# EAGLE board RGBW+Bluetooth+adapter (EAGLE 5.10), part 1 of 2
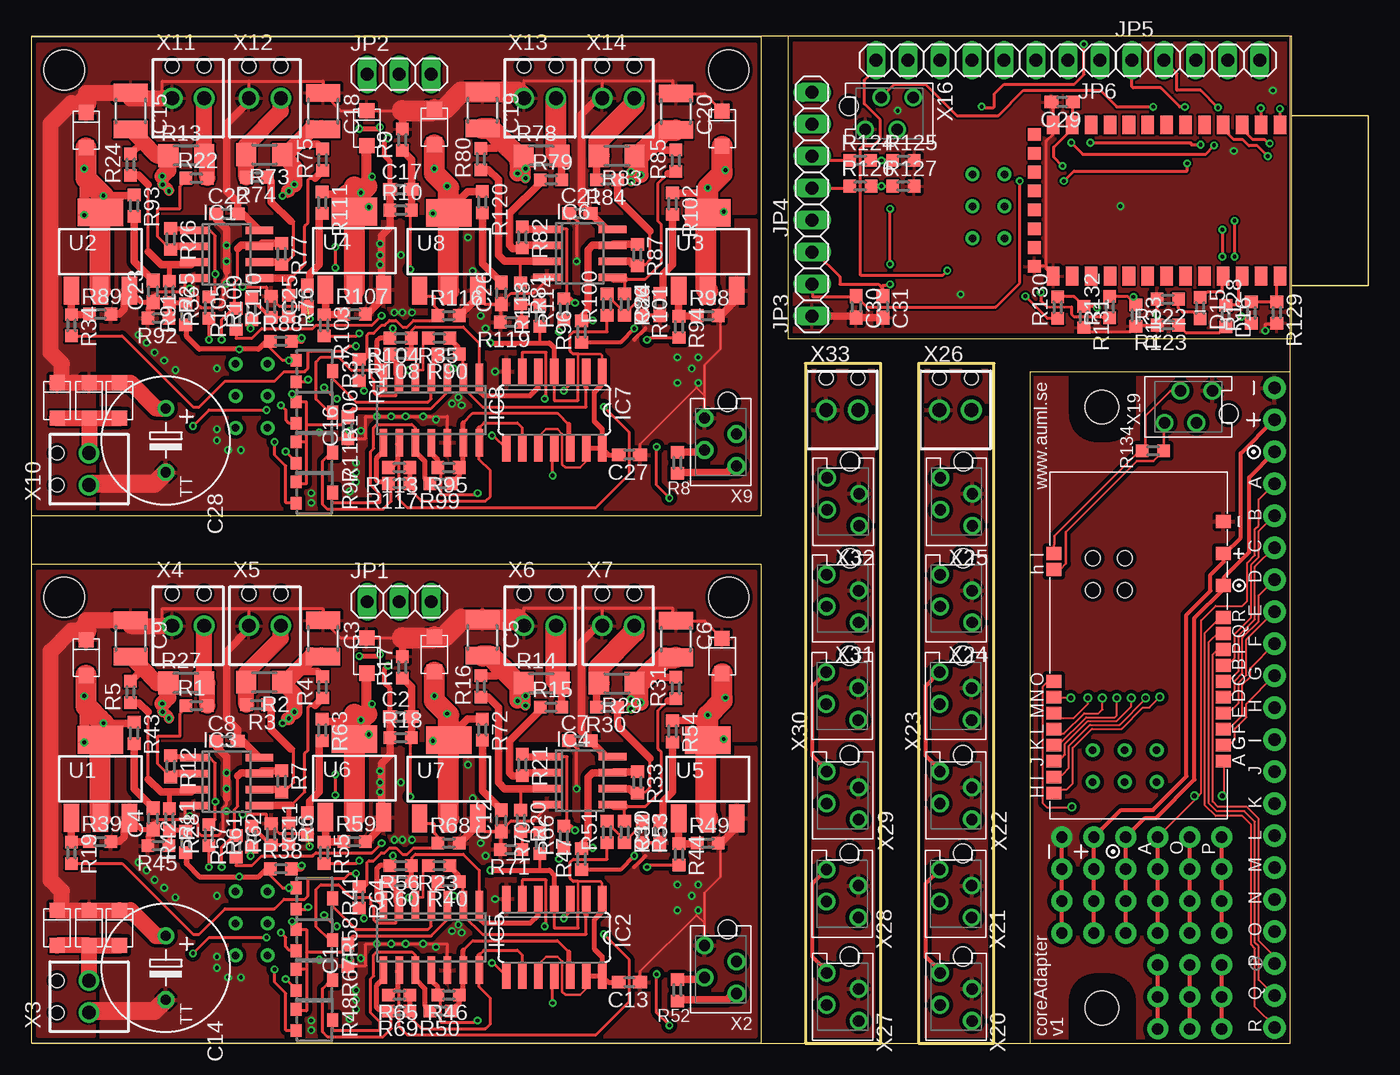
[diagram p0: board, top side]
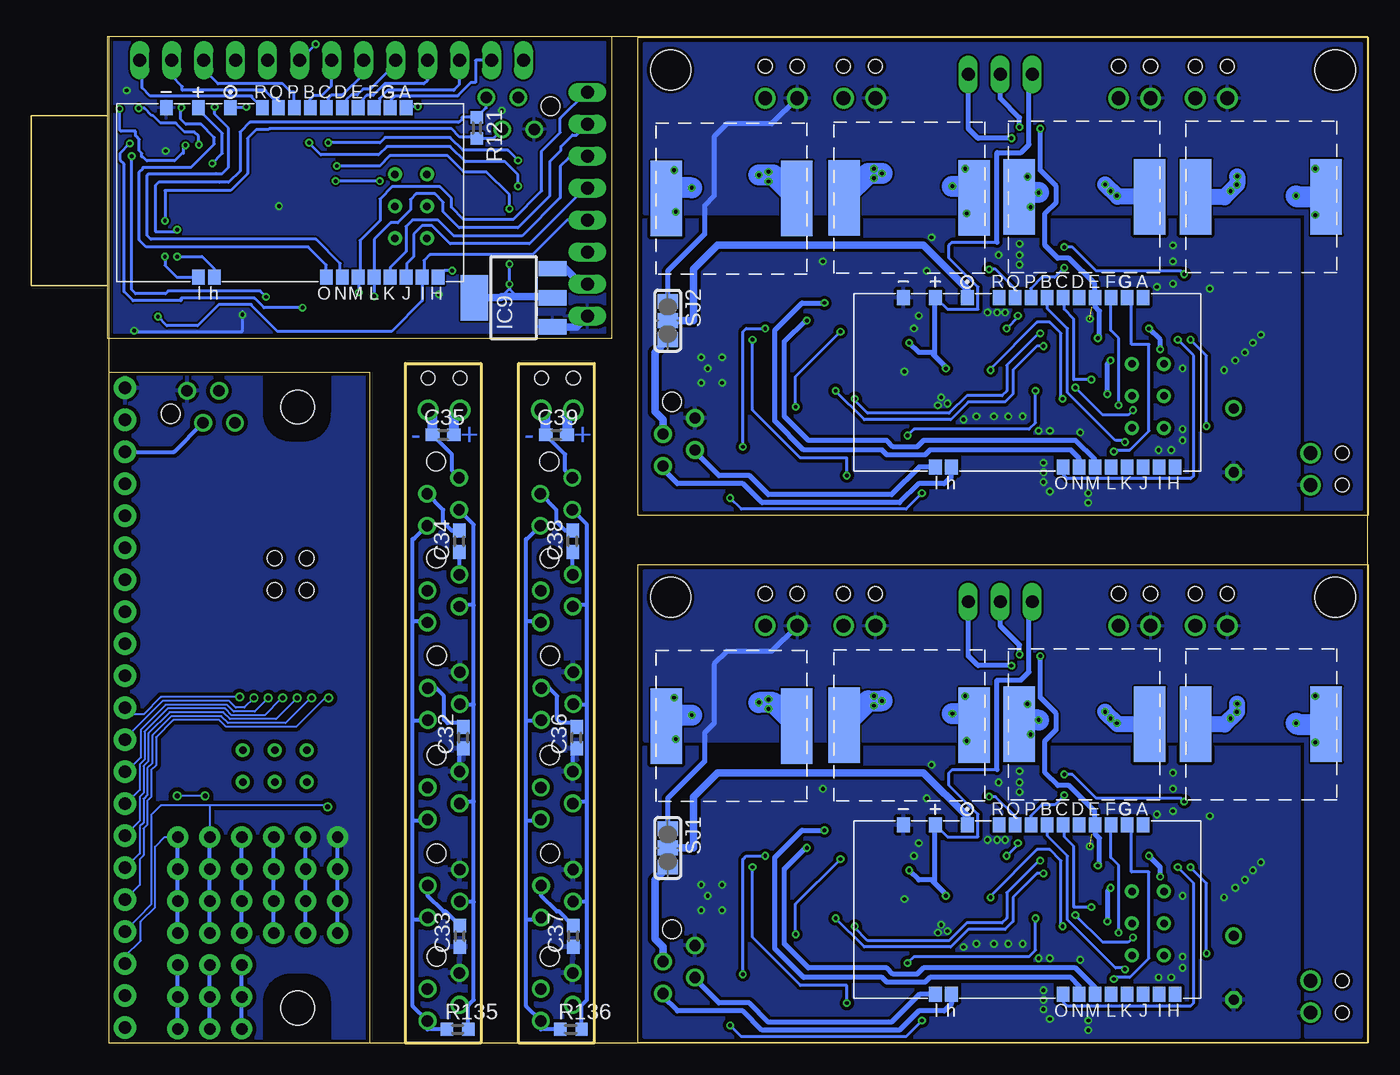
[diagram p1: board, bottom side, seen from below]

Size 100.1 x 80 mm. Coordinates in mm from the lower left corner, seen from the top.
Outline: 0,80 100,80 100,0 0,0 0,80
Outline: 58,80.01 0,80
Outline: 0,0.03 58,0.03 58,38.03 0,38.03 0,0.03
Outline: 0,41.93 58,41.93 58,79.93 0,79.93 0,41.93
Outline: 60.1,56 100.1,56 100.1,80 60.1,80 60.1,56
Outline: 100.01,0 100.01,53.34 79.3,53.34 79.3,0 100.01,0
Outline: 76.47,0.01 76.47,54.01 70.47,54.01 70.47,0.01 76.47,0.01
Outline: 67.47,0.01 67.47,54.01 61.46,54.01 61.46,0.01 67.47,0.01
Copper layers (1*16): Top 0.035mm / dielectric 1.5mm / Bottom 0.035mm
Design rules "ITead_rule": minimum track width 6mil, minimum drill 12mil, track to track 6mil, track to pad 6mil, pad to pad 6mil, via to via 6mil, smd to smd 0mil, copper to edge 10mil, drill to drill 10mil, minimum pad ring 10mil, minimum via ring 6mil, stop-mask expansion 2mil, vias tented up to drill 100mil, thermal gap 10mil
Holes 3.2 mm at 2.6,35.43 55.4,35.43 2.6,77.33 55.4,77.33
Holes 2.7 mm at 85.02,50.55 85.02,2.79

## Footprints (pad centres in the part's own frame; a part is rotated, then mirrored left to right if it is on the bottom)
C0603 = smd 1.1 x 1: 1 -0.85,0; 2 0.85,0
C1210 = smd 1.4 x 2.7: 1 -1.4,0; 2 1.5,0
TT5D10 = drill 0.813 round: + -2.54,0 | drill 0.813 octagon: - 2.54,0
SOD-123W = smd 1.2 x 1.2: A 1.4,0; C -1.4,0
0603 = smd 0.991 x 1.016: A -0.85,0; C 0.85,0
SO08 = smd 0.6 x 2.2: 1 -1.905,-2.6; 2 -0.635,-2.6; 3 0.635,-2.6; 4 1.905,-2.6; 5 1.905,2.6; 6 0.635,2.6; 7 -0.635,2.6; 8 -1.905,2.6
SO14 = smd 0.66 x 2.032: 1 -3.81,-3.073; 2 -2.54,-3.073; 3 -1.27,-3.073; 4 0,-3.073; 5 1.27,-3.073; 6 2.54,-3.073; 7 3.81,-3.073; 8 3.81,3.073; 9 2.54,3.073; 10 1.27,3.073; 11 0,3.073; 12 -1.27,3.073; 13 -2.54,3.073; 14 -3.81,3.073
SO14' = smd 0.6 x 2.2: 1 -3.81,-2.6; 2 -2.54,-2.6; 3 -1.27,-2.6; 4 0,-2.6; 5 1.27,-2.6; 6 2.54,-2.6; 7 3.81,-2.6; 8 3.81,2.6; 9 2.54,2.6; 10 1.27,2.6; 11 0,2.6; 12 -1.27,2.6; 13 -2.54,2.6; 14 -3.81,2.6
SOT223 = smd 1.219 x 2.235: 1 -2.311,-3.099; 2 0,-3.099; 3 2.311,-3.099 | smd 3.6 x 2.2: 4 0,3.099
1X03 = drill 1.016 long: 1 -2.54,0; 2 0,0; 3 2.54,0
1X05 = drill 1.016 long: 1 -5.08,0; 2 -2.54,0; 3 0,0; 4 2.54,0; 5 5.08,0
1X08 = drill 1.016 long: 1 -8.89,0; 2 -6.35,0; 3 -3.81,0; 4 -1.27,0; 5 1.27,0; 6 3.81,0; 7 6.35,0; 8 8.89,0
R0603 = smd 0.991 x 1.016: 1 -0.85,0; 2 0.85,0
R1206 = smd 1.6 x 1.803: 1 -1.422,0; 2 1.422,0
TRIM_PVZ3 = smd 1 x 0.9: 1 0.5,0.45; 3 2.2,0.45 | smd 1.1 x 0.9: 2 1.35,3.35
SJ_2_NO = smd 1.168 x 1.6: 1 -1.524,0; 2 0,0; 3 1.524,0
12X12 = smd 6 x 2.5: P$1 6,0.79; P$2 6,11.15
BC4 = smd 1.5 x 1: 1 -5.75,9.5; 2 -5.75,8; 3 -5.75,6.5; 4 -5.75,5; 5 -5.75,3.5; 6 -5.75,2; 7 -5.75,0.5; 8 -5.75,-1; 9 -5.75,-2.5; 10 -5.75,-4; 11 -5.75,-5.5; 12 -5.75,-7; 13 -5.75,-8.5; 22 6.25,-8.5; 23 6.25,-7; 24 6.25,-5.5; 25 6.25,-4; 26 6.25,-2.5; 27 6.25,-1; 28 6.25,0.5; 29 6.25,2; 30 6.25,3.5; 31 6.25,5; 32 6.25,6.5; 33 6.25,8; 34 6.25,9.5 | smd 1 x 1: 14 -5,-10; 15 -3.5,-10; 16 -2,-10; 17 -0.5,-10; 18 1,-10; 19 2.5,-10; 20 4,-10; 21 5.5,-10
CORETWO_LAYOUT_ISPHOLES_CU = smd 1 x 1.2: 5V 7.315,-6.648; A -9.195,-6.648; B -1.575,-6.648; C -2.845,-6.648; CANH 6.045,6.814; CANL 7.315,6.814; D -4.115,-6.648; E -5.385,-6.648; F -6.655,-6.648; G -7.925,-6.648; GND 9.855,-6.648; H -11.735,6.814; I -10.465,6.814; J -9.195,6.814; K -7.925,6.814; L -6.655,6.814; M -5.385,6.814; N -4.115,6.814; O -2.845,6.814; P -0.305,-6.648; Q 0.965,-6.648; R 2.235,-6.648; VCAN 4.775,-6.648 | drill 0.6 round: P$1 -10.846,3.708; P$2 -8.306,3.708; P$3 -10.846,1.168; P$4 -8.306,1.168; P$5 -8.306,-1.372; P$6 -10.846,-1.372
MICROMATCH-4 = drill 0.9 round: 1 1.905,1.27; 2 0.635,-1.27; 3 -0.635,1.27; 4 -1.905,-1.27 | hole 1.5: 3.199,-0.562
PCB2 = drill 1.1 round: 1 -2.54,0; 2 0,0 | hole 1.1: -2.54,2.54; 0,2.54
CORE_IOHEAD_NOSILC = drill 1 pad 1.778 round: 1 25.4,0; 2 22.86,0; 3 20.32,0; 4 17.78,0; 5 15.24,0; 6 12.7,0; 7 10.16,0; 8 7.62,0; 9 5.08,0; 10 2.54,0; 11 0,0; 12 -2.54,0; 13 -5.08,0; 14 -7.62,0; 15 -10.16,0; 16 -12.7,0; 17 -15.24,0; 18 -17.78,0; 19 -20.32,0; 20 -22.86,0; 21 -25.4,0
CORETWO_LAYOUT_CU = smd 1 x 1.2: 5V 7.62,-7.258; A -8.89,-7.258; B -1.27,-7.258; C -2.54,-7.258; CANH 6.35,6.204; CANL 7.62,6.204; D -3.81,-7.258; E -5.08,-7.258; F -6.35,-7.258; G -7.62,-7.258; GND 10.16,-7.258; H -11.43,6.204; I -10.16,6.204; J -8.89,6.204; K -7.62,6.204; L -6.35,6.204; M -5.08,6.204; N -3.81,6.204; O -2.54,6.204; P 0,-7.258; Q 1.27,-7.258; R 2.54,-7.258; VCAN 5.08,-7.258 | drill 0.6 round: P$1 -10.541,3.099; P$2 -8.001,3.099; P$3 -10.541,0.559; P$4 -8.001,0.559; P$5 -8.001,-1.981; P$6 -10.541,-1.981 | hole 1.2: 4.699,3.099; 7.239,3.099; 7.239,0.559; 4.699,0.559

## Placement (x,y rotation side)
C1  100n  [C0603]  25.15,7.01 90 top
C2  100n  [C0603]  29.34,25.94 0 top
C3  [C1210]  23.16,32.2 270 top
C4  10n  [C0603]  9.67,17.84 90 top
C5  [C1210]  35.81,32.29 270 top
C6  [C1210]  51.18,32.16 270 top
C7  100n  [C0603]  43.56,24.03 0 top
C8  100n  [C0603]  15.52,24.01 0 top
C9  [C1210]  7.87,32.22 270 top
C10  10n  [C0603]  49.91,16.79 90 top
C11  10n  [C0603]  21.92,17.43 90 top
C12  10n  [C0603]  37.34,17.68 90 top
C13  100n  [C0603]  47.5,4.85 180 top
C14  EEUFK1V102L  [TT5D10]  10.67,6 270 top
C15  [C1210]  7.87,74.11 270 top
C16  100n  [C0603]  25.15,48.91 90 top
C17  100n  [C0603]  29.34,67.84 0 top
C18  [C1210]  23.16,74.11 270 top
C19  [C1210]  35.81,74.19 270 top
C20  [C1210]  51.18,74.06 270 top
C21  100n  [C0603]  43.56,65.93 0 top
C22  100n  [C0603]  15.52,65.91 0 top
C23  10n  [C0603]  9.67,59.74 90 top
C24  10n  [C0603]  49.91,58.69 90 top
C25  10n  [C0603]  21.92,59.34 90 top
C26  10n  [C0603]  37.34,59.58 90 top
C27  100n  [C0603]  47.5,46.75 180 top
C28  EEUFK1V102L  [TT5D10]  10.67,47.9 270 top
C29  100n  [C0603]  81.87,74.77 180 top
C30  0.22µ  [C0603]  65.51,58.5 270 top
C31  100n  [C0603]  67.63,58.5 270 top
C32  [C0603]  71.86,24.28 90 bottom
C33  [C0603]  72.13,8.5 90 bottom
C34  [C0603]  72.18,39.88 90 bottom
C35  [C0603]  73.46,48.33 0 bottom
C36  [C0603]  62.86,24.28 90 bottom
C37  [C0603]  63.13,8.5 90 bottom
C38  [C0603]  63.18,39.88 90 bottom
C39  [C0603]  64.46,48.33 0 bottom
D1  [SOD-123W]  4.35,30.64 270 top
D2  [SOD-123W]  26.64,30.8 270 top
D3  [SOD-123W]  32,30.89 270 top
D4  [SOD-123W]  54.86,30.76 270 top
D5  [SOD-123W]  2.03,9.17 270 top
D6  [SOD-123W]  4.57,9.17 270 top
D7  [SOD-123W]  6.98,9.17 270 top
D8  [SOD-123W]  4.35,72.54 270 top
D9  [SOD-123W]  2.03,51.07 270 top
D10  [SOD-123W]  26.64,72.7 270 top
D11  [SOD-123W]  32,72.79 270 top
D12  [SOD-123W]  54.86,72.66 270 top
D13  [SOD-123W]  4.57,51.07 270 top
D14  [SOD-123W]  6.98,51.07 270 top
D15  LED  [0603]  92.83,58.42 270 top
D16  LED  [0603]  94.86,57.78 270 top
IC1  TL082D  [SO08]  15.5,62.69 270 top
IC2  74HC126D  [SO14]  41.53,8.41 180 top
IC3  TL082D  [SO08]  15.5,20.79 270 top
IC4  TL082D  [SO08]  43.56,20.86 270 top
IC5  LM339D  [SO14']  31.75,8.41 180 top
IC6  TL082D  [SO08]  43.56,62.76 270 top
IC7  74HC126D  [SO14]  41.53,50.31 180 top
IC8  LM339D  [SO14']  31.75,50.31 180 top
IC9  LM1117MP-3.3  [SOT223]  67.88,59.23 90 bottom
JP1  [1X03]  29.21,35.08 0 top
JP2  [1X03]  29.21,76.98 0 top
JP3  [1X03]  62.01,60.32 90 top
JP4  [1X05]  62.01,70.48 90 top
JP5  [1X05]  92.49,78.1 0 top
JP6  [1X08]  75.98,78.1 180 top
R1  5k  [R0603]  13.11,26.83 0 top
R2  0R1  [R1206]  18.49,28.7 180 top
R3  5k  [R0603]  17.91,26.9 180 top
R4  5k  [R0603]  23.13,28.29 90 top
R5  5k  [R0603]  7.87,27.91 90 top
R6  250k  [R0603]  20.43,16.66 270 top
R7  250k  [R0603]  19.87,20.81 270 top
R8  [R0603]  51.31,46.12 90 top
R9  47k  [R0603]  29.46,71.77 90 top
R10  12k  [R0603]  29.34,66.19 0 top
R11  250k  [R0603]  10.96,17.8 270 top
R12  250k  [R0603]  11.06,22 270 top
R13  0R1  [R1206]  12.3,70.52 0 top
R14  0R1  [R1206]  40.51,28.6 0 top
R15  5k  [R0603]  41.27,26.7 0 top
R16  5k  [R0603]  35.69,28.35 90 top
R17  47k  [R0603]  29.46,29.87 90 top
R18  12k  [R0603]  29.34,24.29 0 top
R19  10  [R0603]  3.17,15.14 270 top
R20  250k  [R0603]  38.86,17.68 270 top
R21  250k  [R0603]  38.99,22.13 270 top
R22  5k  [R0603]  13.11,68.73 0 top
R23  40k  [R0603]  32.38,14.12 180 top
R24  5k  [R0603]  7.87,69.81 90 top
R25  250k  [R0603]  10.96,59.7 270 top
R26  250k  [R0603]  11.06,63.9 270 top
R27  0R1  [R1206]  12.3,28.62 0 top
R28  1k  [R0603]  14.1,16.54 90 top
R29  0R1  [R1206]  46.48,28.6 180 top
R30  5k  [R0603]  45.72,26.7 180 top
R31  5k  [R0603]  51.18,28.22 90 top
R32  250k  [R0603]  47.12,16.79 270 top
R33  250k  [R0603]  48.13,20.73 270 top
R34  10  [R0603]  3.17,57.04 270 top
R35  40k  [R0603]  32.38,56.02 180 top
R36  1k  [R0603]  14.1,58.44 90 top
R37  [TRIM_PVZ3]  20.57,54.76 270 top
R38  40k  [R0603]  19.81,13.87 0 top
R39  10k  [R0603]  5.46,16.03 0 top
R40  15k  [R0603]  33.15,12.86 180 top
R41  [TRIM_PVZ3]  20.57,12.86 270 top
R42  500  [R0603]  12.25,16.01 90 top
R43  500  [R0603]  8.16,24.65 270 top
R44  10  [R0603]  51.43,15.01 270 top
R45  10k  [R0603]  10.09,15.71 180 top
R46  40k  [R0603]  33.15,3.84 180 top
R47  1k  [R0603]  43.69,14.63 90 top
R48  [TRIM_PVZ3]  20.57,3.2 270 top
R49  10k  [R0603]  53.72,15.9 0 top
R50  15k  [R0603]  32.51,2.57 180 top
R51  500  [R0603]  45.72,16.79 90 top
R52  [R0603]  51.31,4.22 90 top
R53  10k  [R0603]  48.51,16.79 270 top
R54  500  [R0603]  50.93,24.79 270 top
R55  10  [R0603]  23.24,15.14 270 top
R56  40k  [R0603]  29.34,14.12 180 top
R57  1k  [R0603]  16.26,15.65 90 top
R58  [TRIM_PVZ3]  20.57,9.55 270 top
R59  10k  [R0603]  25.65,16.03 0 top
R60  15k  [R0603]  29.34,12.86 180 top
R61  500  [R0603]  17.49,16.42 90 top
R62  10k  [R0603]  19.05,16.61 90 top
R63  500  [R0603]  23.1,24.89 270 top
R64  10  [R0603]  26.04,11.59 270 top
R65  40k  [R0603]  29.21,3.84 180 top
R66  1k  [R0603]  42.29,16.41 90 top
R67  [TRIM_PVZ3]  20.57,6.38 270 top
R68  10k  [R0603]  33.15,15.9 0 top
R69  15k  [R0603]  29.21,2.57 180 top
R70  500  [R0603]  40.39,15.9 90 top
R71  10k  [R0603]  38.1,15.39 180 top
R72  500  [R0603]  35.81,24.92 270 top
R73  0R1  [R1206]  18.49,70.6 180 top
R74  5k  [R0603]  17.91,68.8 180 top
R75  5k  [R0603]  23.13,70.19 90 top
R76  250k  [R0603]  20.43,58.56 270 top
R77  250k  [R0603]  19.87,62.71 270 top
R78  0R1  [R1206]  40.51,70.5 0 top
R79  5k  [R0603]  41.27,68.6 0 top
R80  5k  [R0603]  35.69,70.25 90 top
R81  250k  [R0603]  38.86,59.58 270 top
R82  250k  [R0603]  38.99,64.03 270 top
R83  0R1  [R1206]  46.48,70.5 180 top
R84  5k  [R0603]  45.72,68.6 180 top
R85  5k  [R0603]  51.18,70.12 90 top
R86  250k  [R0603]  47.12,58.69 270 top
R87  250k  [R0603]  48.13,62.63 270 top
R88  40k  [R0603]  19.81,55.77 0 top
R89  10k  [R0603]  5.46,57.93 0 top
R90  15k  [R0603]  33.15,54.76 180 top
R91  500  [R0603]  12.25,57.91 90 top
R92  10k  [R0603]  10.09,57.61 180 top
R93  500  [R0603]  8.16,66.55 270 top
R94  10  [R0603]  51.43,56.91 270 top
R95  40k  [R0603]  33.15,45.74 180 top
R96  1k  [R0603]  43.69,56.53 90 top
R97  [TRIM_PVZ3]  20.57,45.1 270 top
R98  10k  [R0603]  53.72,57.8 0 top
R99  15k  [R0603]  32.51,44.47 180 top
R100  500  [R0603]  45.72,58.69 90 top
R101  10k  [R0603]  48.51,58.69 270 top
R102  500  [R0603]  50.93,66.69 270 top
R103  10  [R0603]  23.24,57.04 270 top
R104  40k  [R0603]  29.34,56.02 180 top
R105  1k  [R0603]  16.26,57.55 90 top
R106  [TRIM_PVZ3]  20.57,51.45 270 top
R107  10k  [R0603]  25.65,57.93 0 top
R108  15k  [R0603]  29.34,54.76 180 top
R109  500  [R0603]  17.49,58.32 90 top
R110  10k  [R0603]  19.05,58.51 90 top
R111  500  [R0603]  23.1,66.79 270 top
R112  10  [R0603]  26.04,53.48 270 top
R113  40k  [R0603]  29.21,45.74 180 top
R114  1k  [R0603]  42.29,58.31 90 top
R115  [TRIM_PVZ3]  20.57,48.28 270 top
R116  10k  [R0603]  33.15,57.8 0 top
R117  15k  [R0603]  29.21,44.47 180 top
R118  500  [R0603]  40.39,57.8 90 top
R119  10k  [R0603]  38.1,57.3 180 top
R120  500  [R0603]  35.81,66.82 270 top
R121  [R0603]  70.79,72.72 270 bottom
R122  1k  [R0603]  90.26,59.11 180 top
R123  1k  [R0603]  90.27,57.07 180 top
R124  4k7  [R0603]  65.83,70.14 0 top
R125  6k8  [R0603]  69.27,70.14 0 top
R126  4k7  [R0603]  65.84,68.1 0 top
R127  6k8  [R0603]  69.25,68.1 0 top
R128  4k7  [R0603]  96.9,58.03 90 top
R129  6k8  [R0603]  98.93,58.05 270 top
R130  4k7  [R0603]  81.52,58.46 90 top
R131  6k8  [R0603]  83.59,57.71 270 top
R132  4k7  [R0603]  85.65,58.5 90 top
R133  6k8  [R0603]  87.73,57.82 270 top
R134  [R0603]  89.08,47.07 180 top
R135  [R0603]  72.32,1.11 0 bottom
R136  [R0603]  63.32,1.11 0 bottom
SJ1  [SJ_2_NO]  55.63,15.52 270 bottom
SJ2  [SJ_2_NO]  55.63,57.42 270 bottom
U1  NFT3055L175  [SOT223]  5.48,21 0 top
U2  NFT3055L175  [SOT223]  5.48,62.9 0 top
U3  NFT3055L175  [SOT223]  53.72,62.88 0 top
U4  NFT3055L175  [SOT223]  25.66,62.96 0 top
U5  NFT3055L175  [SOT223]  53.72,20.98 0 top
U6  NFT3055L175  [SOT223]  25.66,21.06 0 top
U7  NFT3055L175  [SOT223]  33.15,20.98 0 top
U8  NFT3055L175  [SOT223]  33.15,62.88 0 top
U$1  12X12  [12X12]  44.58,19.2 90 bottom
U$2  12X12  [12X12]  42.42,31.27 270 bottom
U$3  12X12  [12X12]  16.56,19.34 90 bottom
U$4  12X12  [12X12]  14.48,31.34 270 bottom
U$5  12X12  [12X12]  44.58,61.1 90 bottom
U$6  12X12  [12X12]  42.42,73.17 270 bottom
U$7  12X12  [12X12]  16.56,61.24 90 bottom
U$8  12X12  [12X12]  14.48,73.24 270 bottom
U$9  BT_BC4  [BC4]  89.67,67.21 270 top
X1  CORETWO_LAYOUTISPHOLES_CU  [CORETWO_LAYOUT_ISPHOLES_CU]  27.05,10.7 180 bottom
X2  MICROMATCH-4  [MICROMATCH-4]  54.74,5.87 90 top
X3  BLOCK2  [PCB2]  4.57,4.98 90 top
X4  BLOCK2  [PCB2]  13.72,33.17 0 top
X5  BLOCK2  [PCB2]  19.81,33.17 0 top
X6  BLOCK2  [PCB2]  41.66,33.17 0 top
X7  BLOCK2  [PCB2]  47.88,33.17 0 top
X8  CORETWO_LAYOUTISPHOLES_CU  [CORETWO_LAYOUT_ISPHOLES_CU]  27.05,52.6 180 bottom
X9  MICROMATCH-4  [MICROMATCH-4]  54.74,47.77 90 top
X10  BLOCK2  [PCB2]  4.57,46.88 90 top
X11  BLOCK2  [PCB2]  13.72,75.08 0 top
X12  BLOCK2  [PCB2]  19.81,75.08 0 top
X13  BLOCK2  [PCB2]  41.66,75.08 0 top
X14  BLOCK2  [PCB2]  47.88,75.08 0 top
X15  CORETWO_LAYOUTISPHOLES_CU  [CORETWO_LAYOUT_ISPHOLES_CU]  85.6,67.67 180 bottom
X16  MICROMATCH-4  [MICROMATCH-4]  68.13,73.87 180 top
X17  CORE_IOHEADEXP  [CORE_IOHEAD_NOSILC]  98.73,26.67 90 bottom
X18  CORETWO_LAYOUTALLHOLES_CU  [CORETWO_LAYOUT_CU]  87.41,31.29 90 top
X19  MICROMATCH-4  [MICROMATCH-4]  91.9,50.57 0 top
X20  MICROMATCH-4  [MICROMATCH-4]  73.44,3.69 90 top
X21  MICROMATCH-4  [MICROMATCH-4]  73.41,11.89 90 top
X22  MICROMATCH-4  [MICROMATCH-4]  73.43,19.69 90 top
X23  MICROMATCH-4  [MICROMATCH-4]  73.41,27.59 90 top
X24  MICROMATCH-4  [MICROMATCH-4]  73.45,35.33 90 top
X25  MICROMATCH-4  [MICROMATCH-4]  73.47,43.03 90 top
X26  BLOCK22.54  [PCB2]  74.67,50.31 0 top
X27  MICROMATCH-4  [MICROMATCH-4]  64.44,3.69 90 top
X28  MICROMATCH-4  [MICROMATCH-4]  64.41,11.89 90 top
X29  MICROMATCH-4  [MICROMATCH-4]  64.43,19.69 90 top
X30  MICROMATCH-4  [MICROMATCH-4]  64.41,27.59 90 top
X31  MICROMATCH-4  [MICROMATCH-4]  64.45,35.33 90 top
X32  MICROMATCH-4  [MICROMATCH-4]  64.47,43.03 90 top
X33  BLOCK22.54  [PCB2]  65.67,50.31 0 top

## Library data of the parts
C1-C39 R1-R136 = rcl
D1-D14 = diode
D15 D16 = led
IC1 IC3-IC6 IC8 = linear
IC2 IC7 = 74xx-eu
IC9 = lm1117mp
JP1-JP6 = pinhead
SJ1 SJ2 = jumper
U1-U8 = NMOS_NTF3055L175
U$1-U$8 = inductor10x10
U$9 = bluetooth
X1 X8 X15 X17 X18 = expboard
X2 X9 X16 X19-X25 X27-X32 = con-amp-micromatch
X3-X7 X10-X14 X26 X33 = terminal_block

## Nets
CANH: R52.1 X1.CANH X2.4
CANH1: R8.1 X8.CANH X9.4
CANH2: R121.1 X15.CANH X16.4
CANH3: R134.1 X18.CANH X19.4
CANH4: R135.1 X20.4 X21.4 X22.4 X23.4 X24.4 X25.4
CANH5: R136.1 X27.4 X28.4 X29.4 X30.4 X31.4 X32.4
CANL: R52.2 X1.CANL X2.3
CANL1: R8.2 X8.CANL X9.3
CANL2: R121.2 X15.CANL X16.3
CANL3: R134.2 X18.CANL X19.3
CANL4: R135.2 X20.3 X21.3 X22.3 X23.3 X24.3 X25.3
CANL5: R136.2 X27.3 X28.3 X29.3 X30.3 X31.3 X32.3
EXP_A: JP6.1 X15.A
EXP_A1: X17.4 X18.A
EXP_B: R48.3 X1.B
EXP_B1: R97.3 X8.B
EXP_B2: JP6.2 X15.B
EXP_B3: X17.5 X18.B
EXP_C: R41.3 X1.C
EXP_C1: R37.3 X8.C
EXP_C2: JP6.3 X15.C
EXP_C3: X17.6 X18.C
EXP_D: JP6.4 X15.D
EXP_D1: X17.7 X18.D
EXP_E: JP1.2 R38.2 X1.E
EXP_E1: JP2.2 R88.2 X8.E
EXP_E2: JP6.5 X15.E
EXP_E3: X17.8 X18.E
EXP_F: R58.3 X1.F
EXP_F1: R106.3 X8.F
EXP_F2: JP6.6 X15.F
EXP_F3: X17.9 X18.F
EXP_G: R67.3 X1.G
EXP_G1: R115.3 X8.G
EXP_G2: JP6.7 X15.G
EXP_G3: X17.10 X18.G
EXP_H: JP6.8 X15.H
EXP_H1: X17.11 X18.H
EXP_I: JP4.1 R128.1 X15.I
EXP_I1: X17.12 X18.I
EXP_J: JP4.2 R126.1 X15.J
EXP_J1: X17.13 X18.J
EXP_K: JP4.3 R124.1 X15.K
EXP_K1: X17.14 X18.K
EXP_L: JP4.4 R130.1 X15.L
EXP_L1: X17.15 X18.L
EXP_M: IC4.7 R33.1 R47.2 X1.M
EXP_M1: IC6.7 R87.1 R96.2 X8.M
EXP_M2: JP4.5 R132.1 X15.M
EXP_M3: X17.16 X18.M
EXP_N: IC4.1 R21.1 R66.2 X1.N
EXP_N1: IC6.1 R82.1 R114.2 X8.N
EXP_N2: JP5.1 X15.N
EXP_N3: X17.17 X18.N
EXP_O: IC3.7 R7.1 R57.2 X1.O
EXP_O1: IC1.7 R77.1 R105.2 X8.O
EXP_O2: JP5.2 X15.O
EXP_O3: X17.18 X18.O
EXP_P: IC3.1 R12.1 R28.2 X1.P
EXP_P1: IC1.1 R26.1 R36.2 X8.P
EXP_P2: JP5.3 X15.P
EXP_P3: X17.19 X18.P
EXP_Q: C2.2 R17.1 R18.2 X1.Q
EXP_Q1: C17.2 R9.1 R10.2 X8.Q
EXP_Q2: JP5.4 X15.Q
EXP_Q3: X17.20 X18.Q
EXP_R: JP5.5 X15.R
EXP_R1: X17.21 X18.R
GATE1: R19.1 R39.1 U1.1
GATE2: R55.1 R59.1 U6.1
GATE3: R64.1 R68.1 U7.1
GATE4: R44.1 R49.1 U5.1
GATE5: R34.1 R89.1 U2.1
GATE6: R103.1 R107.1 U4.1
GATE7: R112.1 R116.1 U8.1
GATE8: R94.1 R98.1 U3.1
GND: C1.1 C2.1 C4.1 C7.1 C8.1 C10.1 C11.1 C12.1 C13.1 C14.- IC2.7 IC3.4 IC4.4 IC5.12 JP1.3 R18.1 R39.2 R45.2 R49.2 R53.2 R59.2 R62.2 R68.2 R71.2 U1.3 U5.3 U6.3 U7.3 X1.GND X2.1 X3.1
GND1: C16.1 C17.1 C21.1 C22.1 C23.1 C24.1 C25.1 C26.1 C27.1 C28.- IC1.4 IC6.4 IC7.7 IC8.12 JP2.3 R10.1 R89.2 R92.2 R98.2 R101.2 R107.2 R110.2 R116.2 R119.2 U2.3 U3.3 U4.3 U8.3 X8.GND X9.1 X10.1
GND2: C29.2 C30.2 C31.2 IC9.1 JP3.1 R122.2 R123.2 R125.2 R127.2 R129.2 R131.2 R133.2 U$9.13 U$9.21 U$9.22 X15.GND X16.1
GND3: X17.1 X18.GND X19.1
GND4: C32.1 C33.1 X20.1 X21.1 X22.1 X23.1
GND5: C34.1 X24.1
GND6: C36.1 C37.1 X27.1 X28.1 X29.1 X30.1
GND7: C38.1 X31.1
L1: D1.A R43.1 U1.2 U1.4 U$4.P$2
L2: D4.A R54.1 U5.2 U5.4 U$1.P$2
L3: D2.A R63.1 U6.2 U6.4 U$3.P$2
L4: D3.A R72.1 U7.2 U7.4 U$2.P$2
L5: D8.A R93.1 U2.2 U2.4 U$8.P$2
L6: D12.A R102.1 U3.2 U3.4 U$5.P$2
L7: D10.A R111.1 U4.2 U4.4 U$7.P$2
L8: D11.A R120.1 U8.2 U8.4 U$6.P$2
LINK: D16.A U$9.32
MODE: D15.A U$9.31
N$1: IC5.5 R23.2 R28.1
N$2: IC2.2 IC5.2 R23.1 R40.1
N$3: C3.2 R2.1 R4.2 U$3.P$1
N$4: R2.2 R3.2 X5.2
N$5: C9.2 R5.2 R27.1 U$4.P$1
N$6: IC3.6 R3.1 R7.2
N$7: SJ1.2 X1.VCAN
N$8: C15.2 R13.1 R24.2 U$8.P$1
N$9: IC3.5 R4.1 R6.1
N$10: R13.2 R22.2 X11.2
N$11: C5.2 R14.1 R16.2 U$2.P$1
N$12: R1.2 R27.2 X4.2
N$13: R14.2 R15.2 X6.2
N$14: IC4.2 R15.1 R21.2
N$15: IC1.2 R22.1 R26.2
N$16: IC8.5 R35.2 R36.1
N$17: IC4.3 R16.1 R20.1
N$18: IC8.4 R37.2 R90.2
N$19: IC3.3 R5.1 R11.1
N$20: C6.2 R29.1 R31.2 U$1.P$1
N$21: IC3.2 R1.1 R12.2
N$22: R29.2 R30.2 X7.2
N$23: IC4.6 R30.1 R33.2
N$24: IC1.3 R24.1 R25.1
N$25: IC7.2 IC8.2 R35.1 R90.1
N$26: IC4.5 R31.1 R32.1
N$27: C18.2 R73.1 R75.2 U$7.P$1
N$28: IC2.3 R19.2
N$29: C4.2 R43.2
N$30: IC5.4 R40.2 R41.2
N$31: R73.2 R74.2 X12.2
N$32: R11.2 R42.2 R45.1
N$33: IC1.6 R74.1 R77.2
N$34: IC1.5 R75.1 R76.1
N$35: IC5.11 R46.2 R47.1
N$36: IC5.10 R48.2 R50.2
N$37: IC2.12 IC5.13 R46.1 R50.1
N$38: IC2.11 R44.2
N$39: R32.2 R51.2 R53.1
N$40: C10.2 R54.2
N$41: IC5.7 R56.2 R57.1
N$42: IC5.6 R58.2 R60.2
N$43: IC2.5 IC5.1 R56.1 R60.1
N$44: IC2.6 R55.2
N$45: R6.2 R61.2 R62.1
N$46: C11.2 R63.2
N$47: IC5.9 R65.2 R66.1
N$48: IC5.8 R67.2 R69.2
N$49: IC2.9 IC5.14 R65.1 R69.1
N$50: IC2.8 R64.2
N$51: R20.2 R70.2 R71.1
N$52: C12.2 R72.2
N$53: C19.2 R78.1 R80.2 U$6.P$1
N$54: R78.2 R79.2 X13.2
N$55: IC6.2 R79.1 R82.2
N$56: IC6.3 R80.1 R81.1
N$57: C20.2 R83.1 R85.2 U$5.P$1
N$58: R83.2 R84.2 X14.2
N$59: IC6.6 R84.1 R87.2
N$60: IC6.5 R85.1 R86.1
N$61: IC7.3 R34.2
N$62: R25.2 R91.2 R92.1
N$63: C23.2 R93.2
N$64: IC8.11 R95.2 R96.1
N$65: IC8.10 R97.2 R99.2
N$66: IC7.12 IC8.13 R95.1 R99.1
N$67: IC7.11 R94.2
N$68: R86.2 R100.2 R101.1
N$69: C24.2 R102.2
N$70: IC8.7 R104.2 R105.1
N$71: IC8.6 R106.2 R108.2
N$72: IC7.5 IC8.1 R104.1 R108.1
N$73: IC7.6 R103.2
N$74: R76.2 R109.2 R110.1
N$75: C25.2 R111.2
N$76: IC8.9 R113.2 R114.1
N$77: IC8.8 R115.2 R117.2
N$78: IC7.9 IC8.14 R113.1 R117.1
N$79: IC7.8 R112.2
N$80: R81.2 R118.2 R119.1
N$81: C26.2 R120.2
N$82: SJ2.2 X8.VCAN
N$83: D15.C R122.1
N$84: D16.C R123.1
N$85: R124.2 R125.1 U$9.1
N$86: R126.2 R127.1 U$9.2
N$87: R128.2 R129.1 U$9.34
N$88: R130.2 R131.1 U$9.3
N$89: R132.2 R133.1 U$9.4
N$90: C35.1 X25.1 X26.2
N$91: C39.1 X32.1 X33.2
V_CAN: SJ1.3 X2.2
V_CAN1: SJ2.3 X9.2
V_CAN2: X15.VCAN X16.2
V_CAN3: X17.3 X18.VCAN X19.2
V_INPUT: D5.A D6.A D7.A X3.2
V_INPUT1: D9.A D13.A D14.A X10.2
V_LED: C3.1 C5.1 C6.1 C7.2 C8.2 C9.1 C14.+ D1.C D2.C D3.C D4.C D5.C D6.C D7.C IC3.8 IC4.8 R17.2 SJ1.1 X4.1 X5.1 X6.1 X7.1
V_LED1: C15.1 C18.1 C19.1 C20.1 C21.2 C22.2 C28.+ D8.C D9.C D10.C D11.C D12.C D13.C D14.C IC1.8 IC6.8 R9.2 SJ2.1 X11.1 X12.1 X13.1 X14.1
VCC: C1.2 C13.2 IC2.1 IC2.4 IC2.10 IC2.13 IC2.14 IC5.3 JP1.1 R38.1 R41.1 R42.1 R48.1 R51.1 R58.1 R61.1 R67.1 R70.1 X1.5V
VCC1: C16.2 C27.2 IC7.1 IC7.4 IC7.10 IC7.13 IC7.14 IC8.3 JP2.1 R37.1 R88.1 R91.1 R97.1 R100.1 R106.1 R109.1 R115.1 R118.1 X8.5V
VCC2: C30.1 IC9.3 JP3.2 X15.5V
VCC3: X17.2 X18.5V
VCC3.3: C29.1 C31.1 IC9.2 IC9.4 JP3.3 U$9.12
VCC_ARNE: C32.2 C33.2 C34.2 C35.2 X20.2 X21.2 X22.2 X23.2 X24.2 X25.2 X26.1
VCC_ARNE1: C36.2 C37.2 C38.2 C39.2 X27.2 X28.2 X29.2 X30.2 X31.2 X32.2 X33.1

## Tracks (layer width: path | path; a pad name or v marks a point on that pad's centre or on a via)
CANH
  Top 0.61: R52.1 51.4,3.46 55.24,3.46 55.75,3.96 X2.4
  Bottom 0.406: X1.CANH 33.1,3.13 33.66,2.57 35.69,2.57 37.21,1.04 48.13,1.04 49.66,2.57 54.86,2.57 56.01,3.71 X2.4
CANH1
  Top 0.61: R8.1 51.4,45.36 55.24,45.36 55.75,45.87 X9.4
  Bottom 0.406: X8.CANH 33.1,45.03 33.66,44.47 35.69,44.47 37.21,42.94 48.13,42.94 49.66,44.47 54.86,44.47 56.01,45.61 X9.4
CANH2  (via drill 0.3)
  Top 0.254: v94.6,64.64 v94.6,62.5
  Bottom 0.254: X16.4 70.04,74.31 R121.1 71.98,73.57 71.98,73.43 72.25,73.17 88.83,73.17 89.6,72.4 89.6,69.3 90.5,68.4 91.23,68.4 91.25,68.41 96.07,68.41 96.32,68.15 96.32,64.48 94.75,64.48 v94.6,64.64 | v94.6,62.5 92.62,62.5 91.65,61.54 X15.CANH
CANH3
  Top 0.203: X18.CANH 81.72,37.64 82.17,38.1 82.17,40.62 87.81,46.25 89.11,46.25 R134.1 | R134.1 89.95,47.09 | R134.1 89.93,49.13 90.02,49.23 90,49.25 X19.4
CANH4
  Bottom 0.305: R135.1 74.71,1.11 X20.4 75.88,2.95 75.88,9.84 | 75.88,9.84 75.88,17.72 | 75.88,17.72 75.88,25.64 | 75.88,25.64 75.88,33.54 | 75.88,33.54 75.88,40.09 75.77,40.09 X25.4 | X24.4 74.83,33.54 75.88,33.54 | X23.4 74.72,25.64 75.88,25.64 | X22.4 74.77,17.72 75.88,17.72 | X21.4 74.82,9.84 75.88,9.84
CANH5
  Bottom 0.305: R136.1 65.71,1.11 X27.4 66.88,2.95 66.88,9.84 | 66.88,9.84 66.88,17.72 | 66.88,17.72 66.88,25.64 | 66.88,25.64 66.88,33.54 | 66.88,33.54 66.88,40.09 66.77,40.09 X32.4 | X31.4 65.83,33.54 66.88,33.54 | X30.4 65.72,25.64 66.88,25.64 | X29.4 65.77,17.72 66.88,17.72 | X28.4 65.82,9.84 66.88,9.84
CANL
  Top 0.61: X2.3 53.3,5.07 R52.2
  Bottom 0.406: X1.CANL 35.64,3.88 37.85,1.68 47.62,1.68 49.15,3.2 51.56,3.2 53.47,5.11 X2.3
CANL1
  Top 0.61: X9.3 53.3,46.97 R8.2
  Bottom 0.406: X8.CANL 35.64,45.78 37.85,43.58 47.62,43.58 49.15,45.1 51.56,45.1 53.47,47.01 X9.3
CANL2  (via drill 0.3)
  Top 0.254: v95.56,65.35 v95.56,62.5
  Bottom 0.254: X15.CANL 94.62,60.85 95.56,61.79 v95.56,62.5 | 95.56,67.7 v95.56,65.35 | 95.56,67.7 95.56,67.75 | X16.3 69.51,71.87 R121.2 70.92,72 72.14,72 72.8,72.66 87.28,72.66 87.34,72.6 88.3,72.6 89,71.9 89,69.1 90.35,67.75 95.51,67.75 95.56,67.7
CANL3
  Top 0.203: X18.CANL 81.25,40.3 88.12,47.17 88.22,47.07 R134.2 88.5,47.32 88.5,49.84 90.48,51.82 91.17,51.82 91.24,51.89 91.27,51.87 X19.3
CANL4
  Bottom 0.305: 71.47,3.05 X20.3 | R135.2 71.47,3.05 | 71.05,11.24 71.05,3.44 71.44,3.05 71.47,3.05 | 71.05,11.24 71.05,19.19 | 71.05,19.19 71.05,26.89 | 71.05,26.89 71.05,34.81 | 71.05,34.81 71.05,41.21 72.2,42.37 X25.3 | X21.3 72.13,11.24 71.05,11.24 | X22.3 72.03,19.19 71.05,19.19 | X23.3 72.07,26.89 71.05,26.89 | X24.3 72.07,34.81 71.05,34.81
CANL5
  Bottom 0.305: 62.47,3.05 X27.3 | R136.2 62.47,3.05 | 62.05,11.24 62.05,3.44 62.44,3.05 62.47,3.05 | 62.05,11.24 62.05,19.19 | 62.05,19.19 62.05,26.89 | 62.05,26.89 62.05,34.81 | 62.05,34.81 62.05,41.21 63.2,42.37 X32.3 | X28.3 63.13,11.24 62.05,11.24 | X29.3 63.03,19.19 62.05,19.19 | X30.3 63.07,26.89 62.05,26.89 | X31.3 63.06,34.81 62.05,34.81
EXP_A  (via drill 0.3)
  Top 0.254: v83.6,79.37 83.6,76.95 82.84,76.19 77.25,76.19 76.49,75.43 76.49,74.39 X15.A 75.57,74.31 v75.47,74.42
  Bottom 0.254: v83.6,79.37 JP6.1 | v75.47,74.42 76.31,74.42 X15.A
EXP_A1  (via drill 0.4 pad 0.25)
  Top 0.152: X18.A 94.72,22.36 94.75,22.33 94.75,19.81 v94.59,19.66 | X17.4 97.49,43.2 97.49,41.15 97.19,40.84 97.19,38.79 96.58,38.18 96.58,35.13 96.2,34.75 94.06,34.75 92.92,33.6 92.92,19.89 92.69,19.66 v92.39,19.66 92.74,19.66 89.46,16.38
  Top 0.305: 89.46,13.84 89.46,16.38
  Bottom 0.152: v92.39,19.66 v94.59,19.66
EXP_B  (via drill 0.3)
  Top 0.254: v19.3,5.87 19.3,4.85 20.19,3.96 20.19,1.04 20.98,1.04 R48.3
  Bottom 0.254: X1.B 25.48,16.49 23.88,14.89 23.88,9.81 20.07,6 19.43,6 v19.3,5.87
EXP_B1  (via drill 0.3)
  Top 0.254: v19.3,47.77 19.3,46.75 20.19,45.87 20.19,42.94 20.98,42.94 R97.3
  Bottom 0.254: X8.B 25.48,58.39 23.88,56.79 23.88,51.71 20.07,47.9 19.43,47.9 v19.3,47.77
EXP_B2
  Bottom 0.254: JP6.2 82.33,76.07 83.09,75.3 83.73,75.3 84.11,74.92 84.11,74.39 X15.B
EXP_B3
  Top 0.152: X18.B 95,30.02 95.59,30.61 95.59,32.54 96.88,33.83 96.88,38.02 97.49,38.63 97.49,40.69 98.71,41.91 X17.5
EXP_C  (via drill 0.3)
  Top 0.254: v21.97,10.82 21.8,10.65 R41.3
  Bottom 0.254: v21.97,10.82 23.37,10.82 23.37,15.65 24.13,16.41 24.13,17.34 X1.C
EXP_C1  (via drill 0.3)
  Top 0.254: v21.97,52.72 21.8,52.55 R37.3
  Bottom 0.254: v21.97,52.72 23.37,52.72 23.37,57.55 24.13,58.31 24.13,59.24 X8.C
EXP_C2
  Bottom 0.254: 82.71,74.36 X15.C 82.61,74.46 82.61,75.05 82.35,75.3 81.49,75.3 79.84,76.95 79.84,78.05 JP6.3
EXP_C3
  Top 0.152: X18.C 94.95,28.63 95.89,29.57 95.89,32.38 97.19,33.68 97.19,37.87 98.71,39.4 X17.6
EXP_D
  Bottom 0.254: JP6.4 77.3,78.05 77.3,77.77 79.26,75.81 79.84,75.81 80.3,75.36 80.75,75.36 81.16,74.95 81.16,74.74 81.5,74.4 81.5,74.3 X15.D
EXP_D1
  Top 0.152: X18.D 94.98,27.36 95.59,27.96 95.59,28.8 96.2,29.41 96.2,32.23 97.49,33.53 97.49,35.59 X17.7 98.79,36.88
EXP_E  (via drill 0.3)
  Top 0.406: v26.04,30.76 27.69,30.76 v27.69,30.89 | R38.2 21.46,13.87 v21.46,14.12
  Bottom 0.406: v26.04,30.76 26.04,27.46 24.77,26.19 24.77,24.92 25.65,24.03 25.65,21.49 24.64,20.48 23.75,20.48 21.72,18.44 21.72,17.34 X1.E 21.67,16.61 21.34,16.28 21.34,14.25 v21.46,14.12 | v27.69,30.89 27.69,31.65 29.21,33.17 JP1.2
EXP_E1  (via drill 0.3)
  Top 0.406: v26.04,72.66 27.69,72.66 v27.69,72.79 | R88.2 21.46,55.77 v21.46,56.02
  Bottom 0.406: v26.04,72.66 26.04,69.36 24.77,68.09 24.77,66.82 25.65,65.93 25.65,63.39 24.64,62.38 23.75,62.38 21.72,60.34 21.72,59.24 X8.E 21.67,58.51 21.34,58.18 21.34,56.15 v21.46,56.02 | v27.69,72.79 27.69,73.55 29.21,75.08 JP2.2
EXP_E2
  Bottom 0.254: X15.E 79.92,74.62 79.92,74.92 79.54,75.3 79.03,75.3 78.11,76.22 75.01,76.22 74.71,76.52 JP6.5
EXP_E3
  Top 0.152: X18.E 95,26.16 95.89,27.05 95.89,28.65 96.5,29.26 96.5,32.08 98.71,34.29 X17.8
EXP_F  (via drill 0.3)
  Top 0.254: v19.81,8.79 20.19,8.41 20.19,7.65 20.45,7.39 20.98,7.39 R58.3
  Bottom 0.254: v19.81,8.79 19.81,14.12 20.45,14.76 20.45,16.79 20.4,16.84 X1.F
EXP_F1  (via drill 0.3)
  Top 0.254: v19.81,50.69 20.19,50.31 20.19,49.55 20.45,49.29 20.98,49.29 R106.3
  Bottom 0.254: v19.81,50.69 19.81,56.02 20.45,56.66 20.45,58.69 20.4,58.74 X8.F
EXP_F2
  Bottom 0.254: JP6.6 72.17,76.19 72.6,75.76 72.6,75.71 77.86,75.71 78.52,75.05 78.52,74.74 X15.F
EXP_F3
  Top 0.152: X18.F 94.95,24.82 96.2,26.06 96.2,28.5 96.81,29.11 96.81,29.79 98.76,31.75 | 98.76,31.75 98.79,31.77 | 98.76,31.75 X17.9
EXP_G  (via drill 0.3)
  Top 0.254: 20.94,4.09 R67.3 21.02,4.28 v20.19,5.11
  Bottom 0.254: X1.G 18.8,17.34 18.8,13.62 17.4,13.62 17.4,6.76 18.92,5.24 20.07,5.24 v20.19,5.11
EXP_G1  (via drill 0.3)
  Top 0.254: 20.94,45.99 R115.3 21.02,46.18 v20.19,47.01
  Bottom 0.254: X8.G 18.8,59.24 18.8,55.52 17.4,55.52 17.4,48.66 18.92,47.13 20.07,47.13 v20.19,47.01
EXP_G2
  Bottom 0.254: JP6.7 70.9,78.1 70.9,76.32 71.28,76.32 72.3,75.3 72.3,75.25 77.3,75.25 77.63,74.92 77.63,74.36 X15.G
EXP_G3
  Top 0.152: X18.G 94.98,23.55 95.59,24.16 95.59,24.99 96.5,25.91 96.5,26.98 X17.10
EXP_H  (via drill 0.3)
  Top 0.254: JP6.8 67.09,77.46 66.15,76.52 66.15,74.64 67.42,73.37 67.42,71.85 66.86,71.29 66.05,71.29 65.84,71.09 65.84,62.25 65.85,62.24 65.85,61.05 72.4,61.05 v72.75,61.39
  Bottom 0.254: v72.75,61.39 73.33,61.39 X15.H
EXP_H1  (via drill 0.4 pad 0.25)
  Top 0.152: X18.H 81.39,19.86 81.72,20.19 82.25,20.19 82.71,20.65 82.71,23.47 84.23,24.99 86.59,24.99 88.27,26.67 88.8,26.67 v89.64,27.51
  Bottom 0.152: X17.11 98.71,26.67 98.25,26.14 97.26,26.14 95.89,27.51 v89.64,27.51
EXP_I  (via drill 0.3)
  Top 0.254: v96.12,57.73 96.36,57.73 R128.1
  Bottom 0.254: v96.12,57.73 95.41,57.02 92.97,57.02 91.3,58.69 88.7,58.69 88.7,58.64 86.62,56.56 77.58,56.56 75.14,59 X15.I 74.99,61 74.99,62.2 74.53,62.66 66.35,62.66 63.61,65.4 JP4.1
EXP_I1  (via drill 0.4 pad 0.25)
  Top 0.152: X18.I 81.51,21.13 81.72,21.34 81.87,21.34 82.4,21.87 82.4,23.62 84.08,25.3 86.44,25.3 88.5,27.36 v88.5,27.43
  Bottom 0.152: v88.5,27.43 89.26,26.67 89.95,26.67 90.48,27.2 95.74,27.2 98.79,24.16 98.76,24.13 X17.12
EXP_J
  Top 0.254: JP4.2 64.73,67.94 64.89,68.1 R126.1
  Bottom 0.254: JP4.2 62.19,67.94 66.61,63.52 72.91,63.52 74.33,64.94 75.14,64.94 75.8,64.28 75.8,62.5 76.36,61.94 76.36,60.9 X15.J
EXP_J1  (via drill 0.4 pad 0.25)
  Top 0.152: X18.J 81.41,22.4 81.72,22.71 81.87,22.71 82.1,22.94 82.1,23.77 83.93,25.6 86.21,25.6 87.36,26.75 v87.36,27.43
  Bottom 0.152: v87.36,27.43 88.42,26.36 90.1,26.36 90.63,26.9 95.51,26.9 97.49,24.92 97.49,22.71 98.63,21.57 98.66,21.59 X17.13
EXP_K
  Top 0.254: R124.1 62.34,70.14 JP4.3
  Bottom 0.254: X15.K 77.68,61.64 76.41,62.91 76.41,64.89 75.9,65.4 73.87,65.4 72.6,64.13 67.22,64.13 64.17,67.18 64.17,69.67 63.51,70.33 62.16,70.33 JP4.3
EXP_K1  (via drill 0.4 pad 0.25)
  Top 0.152: X18.K 81.54,23.67 83.77,25.91 86.06,25.91 86.21,26.06 v86.21,27.43
  Bottom 0.152: v86.21,27.43 86.29,27.43 87.66,26.06 90.25,26.06 90.79,26.59 95.36,26.59 97.19,24.77 97.19,22.55 97.57,22.17 97.57,20.12 98.71,18.97 98.73,19 X17.14
EXP_L  (via drill 0.3)
  Top 0.254: R130.1 80.69,57.61 v78.95,59.35
  Bottom 0.254: v78.95,59.35 X15.L 78.95,63.88 77.63,65.19 77.07,65.19 76.06,66.21 76.06,67.02 75.6,67.48 74.12,67.48 73.46,66.82 73.46,66.06 72.19,64.79 67.52,64.79 64.98,67.33 64.98,70.07 64.12,70.94 64.12,71.24 63.2,72.15 62.87,72.15 JP4.4
EXP_L1  (via drill 0.4 pad 0.25)
  Top 0.152: X18.L 81.58,24.61 82.02,24.61 83.62,26.21 84.77,26.21 85.07,26.52 v85.07,27.43
  Bottom 0.152: v85.07,27.43 86.75,25.76 90.4,25.76 90.94,26.29 95.2,26.29 96.88,24.61 96.88,22.4 97.26,22.02 97.26,19.89 97.57,19.58 97.57,17.68 X17.15
EXP_M  (via drill 0.3)
  Top 0.406: v44.58,15.52 44.58,15.48 R47.2 43.69,15.9 44.2,16.41
  Top 0.61: R33.1 46.25,21.58 IC4.7 44.58,21.49 44.2,21.11 44.2,16.41
  Bottom 0.406: X1.M 21.67,4.42 23.24,6 35.31,6 35.81,5.49 37.72,5.49 38.23,6 44.45,6 46.35,7.9 46.35,13.87 44.7,15.52 v44.58,15.52
EXP_M1  (via drill 0.3)
  Top 0.406: v44.58,57.42 44.58,57.38 R96.2 43.69,57.8 44.2,58.31
  Top 0.61: R87.1 46.25,63.48 IC6.7 44.58,63.39 44.2,63.01 44.2,58.31
  Bottom 0.406: X8.M 21.67,46.32 23.24,47.9 35.31,47.9 35.81,47.39 37.72,47.39 38.23,47.9 44.45,47.9 46.35,49.8 46.35,55.77 44.7,57.42 v44.58,57.42
EXP_M2  (via drill 0.3)
  Top 0.203: 80.68,58.49 82.61,58.49
  Top 0.254: 85.25,57.73 85.33,57.65 R132.1 85.13,57.65 85.05,57.73 82.81,57.73 82.61,57.93 82.61,58.49 | 80.68,58.49 80.17,59 v80.17,59.66
  Bottom 0.254: v80.17,59.66 80.17,60.81 X15.M 80.07,61 80.07,63.77 78.49,65.35 78.49,67.07 77.53,68.04 73.72,68.04 72.8,67.12 72.8,66.41 71.84,65.45 67.93,65.45 65.64,67.73 65.64,70.88 64.17,72.36 64.17,73.47 62.09,75.56 JP4.5
EXP_M3  (via drill 0.4 pad 0.25)
  Top 0.152: X18.M 81.34,26.21 81.72,25.83 82.78,25.83 83.93,26.98 v83.93,27.43
  Bottom 0.152: v83.93,27.43 84,27.43 85.98,25.45 90.56,25.45 91.09,25.98 95.05,25.98 96.58,24.46 96.58,22.25 96.96,21.87 96.96,19.74 97.26,19.43 97.26,17.53 97.57,17.22 97.57,15.09 98.71,13.95 X17.16
EXP_N  (via drill 0.3)
  Top 0.254: IC4.1 42.54,22.76 42.54,17.55 42.29,17.3 R66.2 42.54,17.52
  Top 0.305: v43.18,16.92 42.84,17.26 R66.2
  Top 0.61: IC4.1 39.2,22.76 R21.1
  Bottom 0.406: X1.N 22.94,4.55 23.62,5.24 34.8,5.24 35.18,4.85 38.23,4.85 38.61,5.24 44.83,5.24 47.12,7.52 47.12,14.76 44.96,16.92 v43.18,16.92
EXP_N1  (via drill 0.3)
  Top 0.254: IC6.1 42.54,64.66 42.54,59.45 42.29,59.2 R114.2 42.54,59.41
  Top 0.305: v43.18,58.82 42.84,59.16 R114.2
  Top 0.61: IC6.1 39.2,64.66 R82.1
  Bottom 0.406: X8.N 22.94,46.45 23.62,47.13 34.8,47.13 35.18,46.75 38.23,46.75 38.61,47.13 44.83,47.13 47.12,49.42 47.12,56.66 44.96,58.82 v43.18,58.82
EXP_N2  (via drill 0.3)
  Top 0.254: JP5.1 87.41,75.99 87.5,75.9 89.7,75.9 91.22,74.39 v91.61,74.39
  Bottom 0.254: X15.N 81.64,61.01 81.64,61.94 83.57,63.87 96.68,63.87 96.98,64.18 96.98,68.97 96.88,69.07 91.55,69.07 91.52,69.1 91,69.1 90.5,69.6 90.5,72.7 91.61,73.81 v91.61,74.39
EXP_N3  (via drill 0.4 pad 0.25)
  Top 0.152: X18.N 82.5,27.48 v82.56,27.43
  Bottom 0.152: v82.56,27.43 82.86,27.43 85.15,25.15 90.71,25.15 91.24,25.68 94.9,25.68 96.27,24.31 96.27,22.1 96.65,21.72 96.65,19.58 96.96,19.28 96.96,17.37 97.26,17.07 97.26,14.94 97.57,14.63 97.57,12.57 98.71,11.43 X17.17
EXP_O  (via drill 0.3)
  Top 0.254: v15.11,14 15.11,15.61 16,16.5 R57.2 16.13,16.5 16.13,18.57 16.38,18.82 16.38,21.24
  Top 0.61: R7.1 18.33,21.66 IC3.7 18.03,21.49 16.64,21.49 16.38,21.24
  Bottom 0.254: X1.O 24.21,3.28 23.88,2.95 14.1,2.95 13.84,3.2 13.84,12.73 v15.11,14
EXP_O1  (via drill 0.3)
  Top 0.254: v15.11,55.9 15.11,57.51 16,58.4 R105.2 16.13,58.4 16.13,60.47 16.38,60.72 16.38,63.14
  Top 0.61: R77.1 18.33,63.56 IC1.7 18.03,63.39 16.64,63.39 16.38,63.14
  Bottom 0.254: X8.O 24.21,45.18 23.88,44.85 14.1,44.85 13.84,45.1 13.84,54.63 v15.11,55.9
EXP_O2  (via drill 0.3)
  Top 0.254: JP5.2 90.99,77.06 90.99,75.71 92.88,75.71 v94.25,74.34
  Bottom 0.254: X15.O 82.76,61.84 84.18,63.26 97.04,63.26 97.59,63.82 97.59,69.21 97.3,69.5 97.3,69.6 93.49,69.6 91.65,71.44 91.65,71.95 92.7,73 93.9,73 94.3,73.4 94.3,74.29 v94.25,74.34
EXP_O3  (via drill 0.4 pad 0.25, 0.9 pad 1.68)
  Top 0.152: X18.O 80.75,28.75 80.34,28.35 80.34,19.05 80.65,18.75 82.61,18.75 82.61,18.8 v82.63,18.8
  Bottom 0.152: X17.18 96.65,11.05 96.65,18.14 95.89,18.9 92,18.9 | v82.63,18.8 82.63,18.75 82.78,18.9 92,18.9 | 92,18.9 v92,16.38
EXP_P  (via drill 0.3)
  Top 0.254: v24.13,21.36 v24.13,19.71 | IC3.1 14.16,22.7 14.61,22.25 v14.61,19.2 14.61,17.77 14.22,17.39 R28.2
  Top 0.406: IC3.1 12.13,22.7 12.06,22.76 11.15,22.76 R12.1
  Bottom 0.254: v24.13,19.71 24.89,18.95 25.91,18.95 26.8,18.06 26.8,17.34 X1.P | v24.13,21.36 23.5,21.36 21.59,19.46 14.86,19.46 v14.61,19.2
EXP_P1  (via drill 0.3)
  Top 0.254: v24.13,63.26 v24.13,61.61 | IC1.1 14.16,64.6 14.61,64.15 v14.61,61.1 14.61,59.67 14.22,59.29 R36.2
  Top 0.406: IC1.1 12.13,64.6 12.06,64.66 11.15,64.66 R26.1
  Bottom 0.254: v24.13,61.61 24.89,60.85 25.91,60.85 26.8,59.96 26.8,59.24 X8.P | v24.13,63.26 23.5,63.26 21.59,61.36 14.86,61.36 v14.61,61.1
EXP_P2
  Bottom 0.254: 92.49,77.61 JP5.3 92.49,77.36 91.35,76.22 86.22,76.22 85.56,75.56 85.3,75.56 X15.P
EXP_P3  (via drill 0.9 pad 1.68)
  Top 0.152: X18.P 94.37,31.42 93.83,30.89 93.83,19.2 94.24,18.8 96.53,18.8 97.49,17.83 97.49,8.15 98.73,6.91 X17.19
  Bottom 0.152: v94.54,16.38 95.59,16.38 96.35,15.62 96.35,10.82 97.49,9.68 97.49,8.15 98.71,6.93 98.71,6.4 98.73,6.38 X17.19
EXP_Q  (via drill 0.3)
  Top 0.254: v30.1,19.59 30.1,24.16
  Top 0.61: C2.2 30.19,28.3 R17.1 | C2.2 R18.2 | C2.2 30.19,24.2 30.23,24.16 30.1,24.16
  Bottom 0.254: 28.07,17.34 X1.Q 28.02,18.01 29.59,19.59 v30.1,19.59
EXP_Q1  (via drill 0.3)
  Top 0.254: v30.1,61.49 30.1,66.06
  Top 0.61: C17.2 30.19,70.2 R9.1 | C17.2 R10.2 | C17.2 30.19,66.1 30.23,66.06 30.1,66.06
  Bottom 0.254: 28.07,59.24 X8.Q 28.02,59.91 29.59,61.49 v30.1,61.49
EXP_Q2
  Bottom 0.254: JP5.4 95.03,76.85 94.19,76.02 94.19,75.71 87.64,75.71 | 87.64,75.71 87.54,75.71 | X15.Q 86.57,75.05 86.98,75.05 87.64,75.71
EXP_Q3
  Top 0.152: X18.Q 94.34,32.69 93.53,31.88 93.53,19.05 94.14,18.44 96.35,18.44 97.19,17.6 97.19,8 97.49,7.7 97.49,5.03 98.71,3.81 X17.20
EXP_R
  Bottom 0.254: JP5.5 97.39,78.1 97.39,75.91 96.73,75.25 88.65,75.25 88.65,75.13 X15.R 87.84,74.49
EXP_R1
  Top 0.152: X18.R 94.32,33.71 93.22,32.61 93.22,18.9 94.06,18.06 96.2,18.06 96.88,17.37 96.88,7.85 97.19,7.54 97.19,2.9 98.79,1.29 98.76,1.27 X17.21
GATE1
  Top 0.61: U1.1 3.17,16 R19.1 4.57,15.99 R39.1
GATE2
  Top 0.61: U6.1 23.35,16.1 R55.1 24.77,15.99 R59.1
GATE3
  Top 0.254: R64.1 26.5,12.44 26.67,12.6 26.67,14.38 26.8,14.51 27.18,14.51 27.81,15.14 28.07,15.14 28.45,15.52 28.96,15.52 29.46,15.01 29.85,15.01 30.35,15.52 31.92,15.52 R68.1 32.3,16.37 32,16.66 32,17.43 31.29,17.43 30.86,17.86
  Top 0.61: R68.1 32.13,15.74 | 30.86,17.86 U7.1
GATE4
  Top 0.61: U5.1 51.41,15.89 R44.1 52.83,15.86 R49.1
GATE5
  Top 0.61: U2.1 3.17,57.9 R34.1 4.57,57.89 R89.1
GATE6
  Top 0.61: U4.1 23.35,58 R103.1 24.77,57.89 R107.1
GATE7
  Top 0.254: R112.1 26.5,54.34 26.67,54.5 26.67,56.28 26.8,56.41 27.18,56.41 27.81,57.04 28.07,57.04 28.45,57.42 28.96,57.42 29.46,56.91 29.85,56.91 30.35,57.42 31.92,57.42 R116.1 32.3,58.27 32,58.56 32,59.33 31.29,59.33 30.86,59.76
  Top 0.61: R116.1 32.13,57.64 | 30.86,59.76 U8.1
GATE8
  Top 0.61: U3.1 51.41,57.79 R94.1 52.83,57.76 R98.1
GND  (via drill 0.3)  (1 unrouted)
  Top 0.203: 53.47,9.55 X2.1 | 53.47,9.55 53.47,11.97 54.74,13.24 54.74,15.9 | 53.47,9.55 52.83,10.19 48.35,5.7 C13.1
  Top 0.254: 9.67,17.45 10.03,17.81 12.06,17.81 12.19,17.93 12.19,18.7 | C11.1 21.58,16.66 19.69,16.66 19.17,17.18 R62.2 18.67,17.83 18.67,18.19 v16.76,18.19 | C12.1 35.99,16.83 35.46,17.36 | R71.2 37.25,16.74 C12.1 | C12.1 37.34,16.92 38.1,17.68 39.88,17.68 40.96,18.76 IC4.4 | C10.1 R53.2 | 15.49,19.46 15.49,18.95 15.24,18.7 15.24,16.92 14.86,16.54 13.46,16.54 13.21,16.79 13.21,17.43 v12.57,18.06 | IC5.12 33.02,7.9 v31.12,7.9 v29.72,7.9 v28.58,7.9 v27.43,7.9 26.54,7.9 26.54,6.16 C1.1 | C7.1 43.35,23.4 43.43,23.4 43.31,23.27 v43.31,20.22
  Top 0.305: 47.88,14 48.77,14.89
  Top 0.406: C4.1 8.7,16.99 U1.3 | C4.1 9.67,16.81 9.27,16.41 9.27,15.74 R45.2 | C4.1 9.67,17.45 | 12.19,18.7 12.32,18.82 12.83,18.82 IC3.4 | C2.1 28.49,28.18 28.07,28.6 28.07,29.75 v28.32,30
  Top 0.61: C8.1 14.67,23.59 15.49,22.76 v15.49,21.49 v15.49,20.22 15.49,19.46 | C2.1 R18.1 28.49,22.93 27.81,22.25 27.81,18.12 U6.3 27.94,17.93 27.94,17.3 26.67,16.03 R59.2 | R49.2 54.74,15.9 56.01,17.17 56.01,17.86 U5.3 | U7.3 35.46,17.36 R68.2 | R39.2 6.98,16.03 7.37,16.41 7.37,17.48 U1.3
  Top 1.422: X3.1 4.7,2.57 9.78,2.57 C14.-
  Bottom 0.406: v28.32,30 30.99,30 31.75,30.76 JP1.3
  other vias: 8.51,14.38 9.14,13.74 9.78,12.98 11.43,11.59 10.54,12.35 14.73,6.89 14.73,6 15.62,5.24 16.64,5.24 14.73,11.71 27.69,21.62 27.69,20.73 27.69,19.97 34.67,22.13 35.05,19.46 51.31,12.6 51.31,10.57 52.45,11.71 52.96,12.6 52.96,10.57 35.69,15.9 36.07,14.89 36.83,11.46 34.16,8.79 22.23,1.04 22.1,15.65 15.49,18.44 29.34,20.73 28.83,16.16 29.46,16.16 30.23,16.16 33.4,8.92 33.91,9.43 32.13,7.65 22.86,6.63 25.27,6.76 26.16,6.76 22.23,1.81 25.27,1.93 25.78,2.69 25.78,3.46 25.78,4.22
  pour Bottom (isolate 0.254, rank 3): 5.5,23.53 57.5,23.53 57.5,0.53 5.5,0.53
  pour Top (isolate 0.305, rank 3): 5.5,23.53 57.5,23.53 57.5,0.53 5.5,0.53
GND1  (via drill 0.3)  (1 unrouted)
  Top 0.203: 53.47,51.45 X9.1 | 53.47,51.45 53.47,53.87 54.74,55.14 54.74,57.8 | 53.47,51.45 52.83,52.09 48.35,47.6 C27.1
  Top 0.254: 9.67,59.35 10.03,59.71 12.06,59.71 12.19,59.84 12.19,60.6 | C25.1 21.58,58.56 19.69,58.56 19.17,59.08 R110.2 18.67,59.73 18.67,60.09 v16.76,60.09 | C26.1 35.99,58.73 35.46,59.26 | R119.2 37.25,58.64 C26.1 | C26.1 37.34,58.82 38.1,59.58 39.88,59.58 40.96,60.66 IC6.4 | C24.1 R101.2 | 15.49,61.36 15.49,60.85 15.24,60.6 15.24,58.82 14.86,58.44 13.46,58.44 13.21,58.69 13.21,59.33 v12.57,59.96 | IC8.12 33.02,49.8 v31.12,49.8 v29.72,49.8 v28.58,49.8 v27.43,49.8 26.54,49.8 26.54,48.06 C16.1 | C21.1 43.35,65.3 43.43,65.3 43.31,65.17 v43.31,62.12
  Top 0.305: 47.88,55.9 48.77,56.79
  Top 0.406: C23.1 8.7,58.89 U2.3 | C23.1 9.67,58.71 9.27,58.31 9.27,57.64 R92.2 | C23.1 9.67,59.35 | 12.19,60.6 12.32,60.72 12.83,60.72 IC1.4 | C17.1 28.49,70.08 28.07,70.5 28.07,71.65 v28.32,71.9
  Top 0.61: C22.1 14.67,65.49 15.49,64.66 v15.49,63.39 v15.49,62.12 15.49,61.36 | C17.1 R10.1 28.49,64.83 27.81,64.15 27.81,60.02 U4.3 27.94,59.83 27.94,59.2 26.67,57.93 R107.2 | R98.2 54.74,57.8 56.01,59.07 56.01,59.76 U3.3 | U8.3 35.46,59.26 R116.2 | R89.2 6.98,57.93 7.37,58.31 7.37,59.38 U2.3
  Top 1.422: X10.1 4.7,44.47 9.78,44.47 C28.-
  Bottom 0.406: v28.32,71.9 30.99,71.9 31.75,72.66 JP2.3
  other vias: 8.51,56.28 9.14,55.64 9.78,54.88 11.43,53.48 10.54,54.25 14.73,48.79 14.73,47.9 15.62,47.13 16.64,47.13 14.73,53.61 27.69,63.52 27.69,62.63 27.69,61.87 34.67,64.03 35.05,61.36 51.31,54.5 51.31,52.47 52.45,53.61 52.96,54.5 52.96,52.47 35.69,57.8 36.07,56.79 36.83,53.36 34.16,50.69 22.23,42.94 22.1,57.55 15.49,60.34 29.34,62.63 28.83,58.06 29.46,58.06 30.23,58.06 33.4,50.82 33.91,51.33 32.13,49.55 22.86,48.53 25.27,48.66 26.16,48.66 22.23,43.71 25.27,43.83 25.78,44.59 25.78,45.36 25.78,46.12
  pour Bottom (isolate 0.254, rank 3): 5.5,65.43 57.5,65.43 57.5,42.43 5.5,42.43
  pour Top (isolate 0.305, rank 3): 5.5,65.43 57.5,65.43 57.5,42.43 5.5,42.43
GND2  (via drill 0.3)
  Top 0.254: R129.2 98.84,57.12 98,57.12 v98,56.61 | R122.2 89.42,59.1 v89.42,57.88 89.42,58.07 89.42,58.08 R123.2 87.82,57.07 R133.2 87.31,56.56 83.89,56.56 R131.2 | U$9.22 80.63,61.5 80.63,61.74 | 80.63,61.74 80.63,71.7 81.17,72.24 U$9.13 81.17,74.73 81.12,74.77 C29.2 | U$9.21 79.7,61.74 80.63,61.74
  Top 0.61: JP3.1 65.38,57.78 C30.2 C31.2
  Bottom 0.254: v98,56.61 97.9,56.51 89.47,56.51 89.42,56.55 89.42,58.13
  Bottom 0.61: JP3.1 62.87,56.92 IC9.1
  other vias: 68.8,74.1 73.8,59.5 86.5,66.5 95.5,70.9 98.6,75.7
  pour Top: 60.6,79.5 99.6,79.5 99.6,56.5 60.6,56.5
  pour Bottom: 60.6,79.5 99.6,79.5 99.6,56.5 60.6,56.5
GND3  (via drill 0.9 pad 1.68)
  other vias: 81.84,16.38
  pour Bottom (isolate 0.305, rank 3): 79.3,0 79.3,53.34 82.23,53.34 82.23,50.04 arc90 84.51,47.62 85.53,47.62 arc90 87.94,50.04 87.94,53.34 98.86,53.34 98.86,0 87.94,0 87.94,3.3 arc90 85.53,5.71 84.51,5.71 arc90 82.23,3.43 82.23,0
  pour Top (isolate 0.305, rank 3): 79.3,0 79.3,53.34 82.23,53.34 82.23,50.04 arc90 84.51,47.62 85.53,47.62 arc90 87.94,50.04 87.94,53.34 98.86,53.34 98.86,0 87.94,0 87.94,3.3 arc90 85.53,5.71 84.51,5.71 arc90 82.23,3.43 82.23,0
GND4
  Top 0.305: X21.1 71.05,12.7 71.05,6.87 72.17,5.75 X20.1 | X23.1 71.05,28.41 71.05,22.85 72.16,21.74 X22.1
  Bottom 0.305: C32.1 72.16,23.13 X22.1
  pour Bottom (isolate 0.305): 70.77,0.31 70.77,53.71 76.17,53.71 76.17,0.31
GND5
  Bottom 0.305: X24.1 C34.1
GND6
  Top 0.305: X28.1 62.05,12.7 62.05,6.87 63.17,5.75 X27.1 | X30.1 62.05,28.41 62.05,22.85 63.16,21.74 X29.1
  Bottom 0.305: C36.1 63.16,23.13 X29.1
  pour Bottom (isolate 0.305): 61.77,0.31 61.77,53.71 67.17,53.71 67.17,0.31
GND7
  Bottom 0.305: X31.1 C38.1
L1  (via drill 0.3)
  Top 0.61: R43.1 8.16,25.43 v5.71,25.43
  Top 0.813: v4.19,23.9 v4.19,27.59 5.71,26.06 v5.71,25.43
  Top 1.676: D1.A 4.35,26.8 v5.71,25.43 5.71,24.34 U1.4 U1.2
  Bottom 1.676: U$4.P$2 5.63,25.34 v5.71,25.43
L2  (via drill 0.3)
  Top 0.61: R54.1 52.87,25.64 53.72,24.79
  Top 0.813: 54.86,27.46 v55.12,27.46
  Top 1.676: D4.A 54.86,27.46 54.86,27.21 v53.72,26.06 53.72,24.79 U5.4 53.64,24.08 53.59,24.03 53.59,18.01 U5.2
  Bottom 0.61: v54.99,24.16 55.73,24.89 U$1.P$2
  Bottom 1.676: v53.72,26.06 54.87,26.06 U$1.P$2
L3  (via drill 0.3)
  Top 0.61: R63.1 23.28,25.55 25.15,25.55 25.65,25.55 25.66,25.55 U6.4
  Top 0.813: 26.64,26.16 D2.A
  Top 1.676: 25.66,26.13 U6.4 U6.2 | 25.15,25.55 26.04,25.55 v26.16,25.68 26.64,26.16
  Bottom 0.406: v26.16,25.68 26.16,25.34 26.8,25.34 | 26.8,25.34 v26.8,24.54 | 26.8,25.34 U$3.P$2 | v27.05,26.95 27.05,25.68 27.3,25.68
  Bottom 1.676: v26.16,25.68 27.3,25.68 27.37,25.68
L4  (via drill 0.3)
  Top 0.61: R72.1 34.63,25.77 33.78,24.92 33.15,24.92
  Top 1.016: v31.88,24.03 31.93,24.08 U7.4
  Top 1.676: D3.A v32,27.59 32,27.21 v33.02,26.19 33.15,26.06 33.15,24.92 U7.4 U7.2
  Bottom 1.676: v33.02,26.19 32.19,26.19 U$2.P$2
L5  (via drill 0.3)
  Top 0.61: R93.1 8.16,67.33 v5.71,67.33
  Top 0.813: v4.19,65.8 v4.19,69.49 5.71,67.96 v5.71,67.33
  Top 1.676: D8.A 4.35,68.69 v5.71,67.33 5.71,66.24 U2.4 U2.2
  Bottom 1.676: U$8.P$2 5.63,67.24 v5.71,67.33
L6  (via drill 0.3)
  Top 0.61: R102.1 52.87,67.54 53.72,66.69
  Top 0.813: 54.86,69.36 v55.12,69.36
  Top 1.676: D12.A 54.86,69.36 54.86,69.11 v53.72,67.96 53.72,66.69 U3.4 53.64,65.98 53.59,65.93 53.59,59.91 U3.2
  Bottom 0.61: v54.99,66.06 55.73,66.79 U$5.P$2
  Bottom 1.676: v53.72,67.96 54.87,67.96 U$5.P$2
L7  (via drill 0.3)
  Top 0.61: R111.1 23.28,67.45 25.15,67.45 25.65,67.45 25.66,67.45 U4.4
  Top 0.813: 26.64,68.06 D10.A
  Top 1.676: 25.66,68.03 U4.4 U4.2 | 25.15,67.45 26.04,67.45 v26.16,67.58 26.64,68.06
  Bottom 0.406: v26.16,67.58 26.16,67.24 26.8,67.24 | 26.8,67.24 v26.8,66.44 | 26.8,67.24 U$7.P$2 | v27.05,68.85 27.05,67.58 27.3,67.58
  Bottom 1.676: v26.16,67.58 27.3,67.58 27.37,67.58
L8  (via drill 0.3)
  Top 0.61: R120.1 34.63,67.67 33.78,66.82 33.15,66.82
  Top 1.016: v31.88,65.93 31.93,65.98 U8.4
  Top 1.676: D11.A v32,69.49 32,69.11 v33.02,68.09 33.15,67.96 33.15,66.82 U8.4 U8.2
  Bottom 1.676: v33.02,68.09 32.19,68.09 U$6.P$2
LINK
  Top 0.254: U$9.32 95.87,60.66 95.87,58.69 95.81,58.63 D16.A
MODE
  Top 0.254: U$9.31 94.6,60.89 94.6,59.66 94.55,59.71 93.43,59.71 92.99,59.27 D15.A
N$1  (via drill 0.3)
  Top 0.203: 31.54,13.91 31.37,13.74 31.12,13.74 31.12,11.59 30.48,11.59
  Top 0.254: v18.67,8.41 14.1,8.41 v12.83,7.14 | v14.1,14 R28.1 | v29.97,11.59 30.48,11.59 IC5.5 | v23.24,10.19 24.13,9.3 v24.26,9.3
  Top 0.406: 31.54,13.91 R23.2
  Bottom 0.254: v24.26,9.3 24.38,9.43 24.38,14.51 25.27,15.39 26.29,15.39 29.97,11.71 v29.97,11.59 | v23.24,10.19 21.08,8.03 19.05,8.03 v18.67,8.41 | v12.83,7.14 12.83,12.73 v14.1,14
N$2
  Top 0.254: 44.07,10.19 44.07,8.66 35.81,8.66 34.29,10.19 IC5.2 34.29,12.56 R40.1
  Top 0.406: 44.07,10.19 IC2.2 | R23.1 33.23,14.04 33.91,13.36 33.91,12.94 R40.1
N$3  (via drill 0.3)
  Top 0.61: R4.2 22.72,29.55 21.02,29.55 | 20.32,25.81 v19.94,25.43 20.85,26.34
  Top 1.016: 20.32,25.81 v20.45,25.81 | v20.89,26.34 20.85,26.34
  Top 1.27: C3.2 23.04,30.82 22.29,30.82 21.02,29.55 20.18,28.7 R2.1 20.89,27.72 v20.89,26.34
  Bottom 1.27: U$3.P$1 19.89,25.34 v20.89,26.34
N$4
  Top 1.27: X5.2 19.81,32.18 17.05,29.41 17.05,28.72 R2.2 R3.2
N$5  (via drill 0.3)
  Top 0.61: R5.2 8.74,29.63 8.74,29.85
  Top 0.813: v10.41,26.32 10.39,26.34 10.39,26.44 10.92,25.91 v10.92,25.81
  Top 1.27: C9.2 8.74,29.85 9.96,28.62 R27.1 10.88,27.46 v10.39,26.98
  Bottom 0.813: 10.39,26.34 v10.41,26.32
  Bottom 1.27: v10.39,26.98 10.39,26.34 11.41,25.32 13.66,25.32 U$4.P$1
N$6
  Top 0.254: 20.57,23.4 20.83,23.4 20.83,20.73 20.06,19.96
  Top 0.61: IC3.6 19.68,20.16 R7.2 20.06,19.96 | R3.1 19.05,26.61 19.05,24.92 20.57,23.4
N$7
  Bottom 0.254: SJ1.2 55.63,13.87
  Bottom 0.61: SJ1.2 53.59,15.52 53.59,19.59 51.69,21.49 35.31,21.49 31.88,18.06 31.88,17.34 X1.VCAN
N$8  (via drill 0.3)
  Top 0.61: R24.2 8.74,71.53 8.74,71.75
  Top 0.813: v10.41,68.22 10.39,68.24 10.39,68.34 10.92,67.81 v10.92,67.71
  Top 1.27: C15.2 8.74,71.75 9.96,70.52 R13.1 10.88,69.36 v10.39,68.88
  Bottom 0.813: 10.39,68.24 v10.41,68.22
  Bottom 1.27: v10.39,68.88 10.39,68.24 11.41,67.22 13.66,67.22 U$8.P$1
N$9
  Top 0.254: 22.52,26.82 22.1,26.82 21.97,26.7 21.97,23.27 21.72,23.02 21.72,19.97 20.64,18.89
  Top 0.406: R6.1 20.43,18.87 20.45,18.89
  Top 0.61: 22.52,26.82 R4.1 | IC3.5 20.45,18.89 20.64,18.89
N$10
  Top 1.27: X11.2 R13.2 13.96,70.52 R22.2
N$11  (via drill 0.3)
  Top 0.254: R14.1 38.61,28.6
  Top 0.61: R16.2 36.92,29.2 37.46,29.75
  Top 0.813: v38.61,27.21 38.86,27.21 v39.24,27.59 v39.24,26.82
  Top 1.27: v38.61,27.21 38.61,28.09 39.09,28.58 R14.1
  Top 1.676: 38.61,28.6 37.46,29.75 36.45,30.76 35.84,30.76 C5.2
  Bottom 1.676: v38.61,27.21 39.69,27.21 U$2.P$1
N$12
  Top 1.27: X4.2 R27.2 13.96,28.62 R1.2
N$13
  Top 0.61: R15.2 42.12,28.41 R14.2
  Top 1.676: X6.2 41.66,28.88 R14.2
N$14
  Top 0.61: IC4.2 39.2,21.49 R21.2 38.95,21.24 38.23,21.24 37.97,21.49 37.97,24.03 40.42,26.48 R15.1
N$15
  Top 0.254: 12.26,68.54 11.81,68.09 11.81,66.31 10.03,66.31 10.03,64.08 R26.2
  Top 0.61: R26.2 11.33,63.33 IC1.2 | 12.26,68.54 R22.1
N$16  (via drill 0.3)
  Top 0.203: 31.54,55.81 31.37,55.64 31.12,55.64 31.12,53.48 30.48,53.48
  Top 0.254: v18.67,50.31 14.1,50.31 v12.83,49.04 | v14.1,55.9 R36.1 | v29.97,53.48 30.48,53.48 IC8.5 | v23.24,52.09 24.13,51.2 v24.26,51.2
  Top 0.406: 31.54,55.81 R35.2
  Bottom 0.254: v24.26,51.2 24.38,51.33 24.38,56.41 25.27,57.3 26.29,57.3 29.97,53.61 v29.97,53.48 | v23.24,52.09 21.08,49.93 19.05,49.93 v18.67,50.31 | v12.83,49.04 12.83,54.63 v14.1,55.9
N$17
  Top 0.254: 38.86,20.22 R20.1
  Top 0.61: R16.1 36.28,27.5 37.08,26.7 37.08,20.73 37.59,20.22 38.86,20.22 IC4.3
N$18
  Top 0.254: IC8.4 31.75,51.2 31.5,50.95 25.78,50.95 23.92,52.8 R37.2
  Top 0.406: R90.2 32.3,54.41 31.75,53.87 IC8.4
N$19
  Top 0.254: 9.27,20.98 9.27,26.32
  Top 0.406: R11.1 10.96,19.93 10.92,19.97
  Top 0.61: R5.1 8.53,27.06 9.27,26.32 | 9.27,20.98 10.29,19.97 10.92,19.97 12.71,19.97 IC3.3
N$20  (via drill 0.3)
  Top 0.61: R31.2 50.08,29.07 49.4,29.75
  Top 0.813: 47.88,27.08 v47.62,27.33 | v48.39,27.08 47.88,27.08 | 47.88,27.08 47.62,26.82 v47.62,26.57
  Top 1.27: v48.39,27.08 48.39,28.6 R29.1
  Top 1.676: R29.1 48.26,28.6 49.4,29.75 50.29,30.64 51.16,30.64 C6.2